# Altium PCB File_Mach_In.PcbDoc
Units mil, origin at the board's own origin, x right, y up, seen from the top; angles counter-clockwise.
Board outline 3895 x 3975 mil, 2 copper layers (Top Layer, Bottom Layer); 38 components, 26 nets, 126 pads, 20 vias.
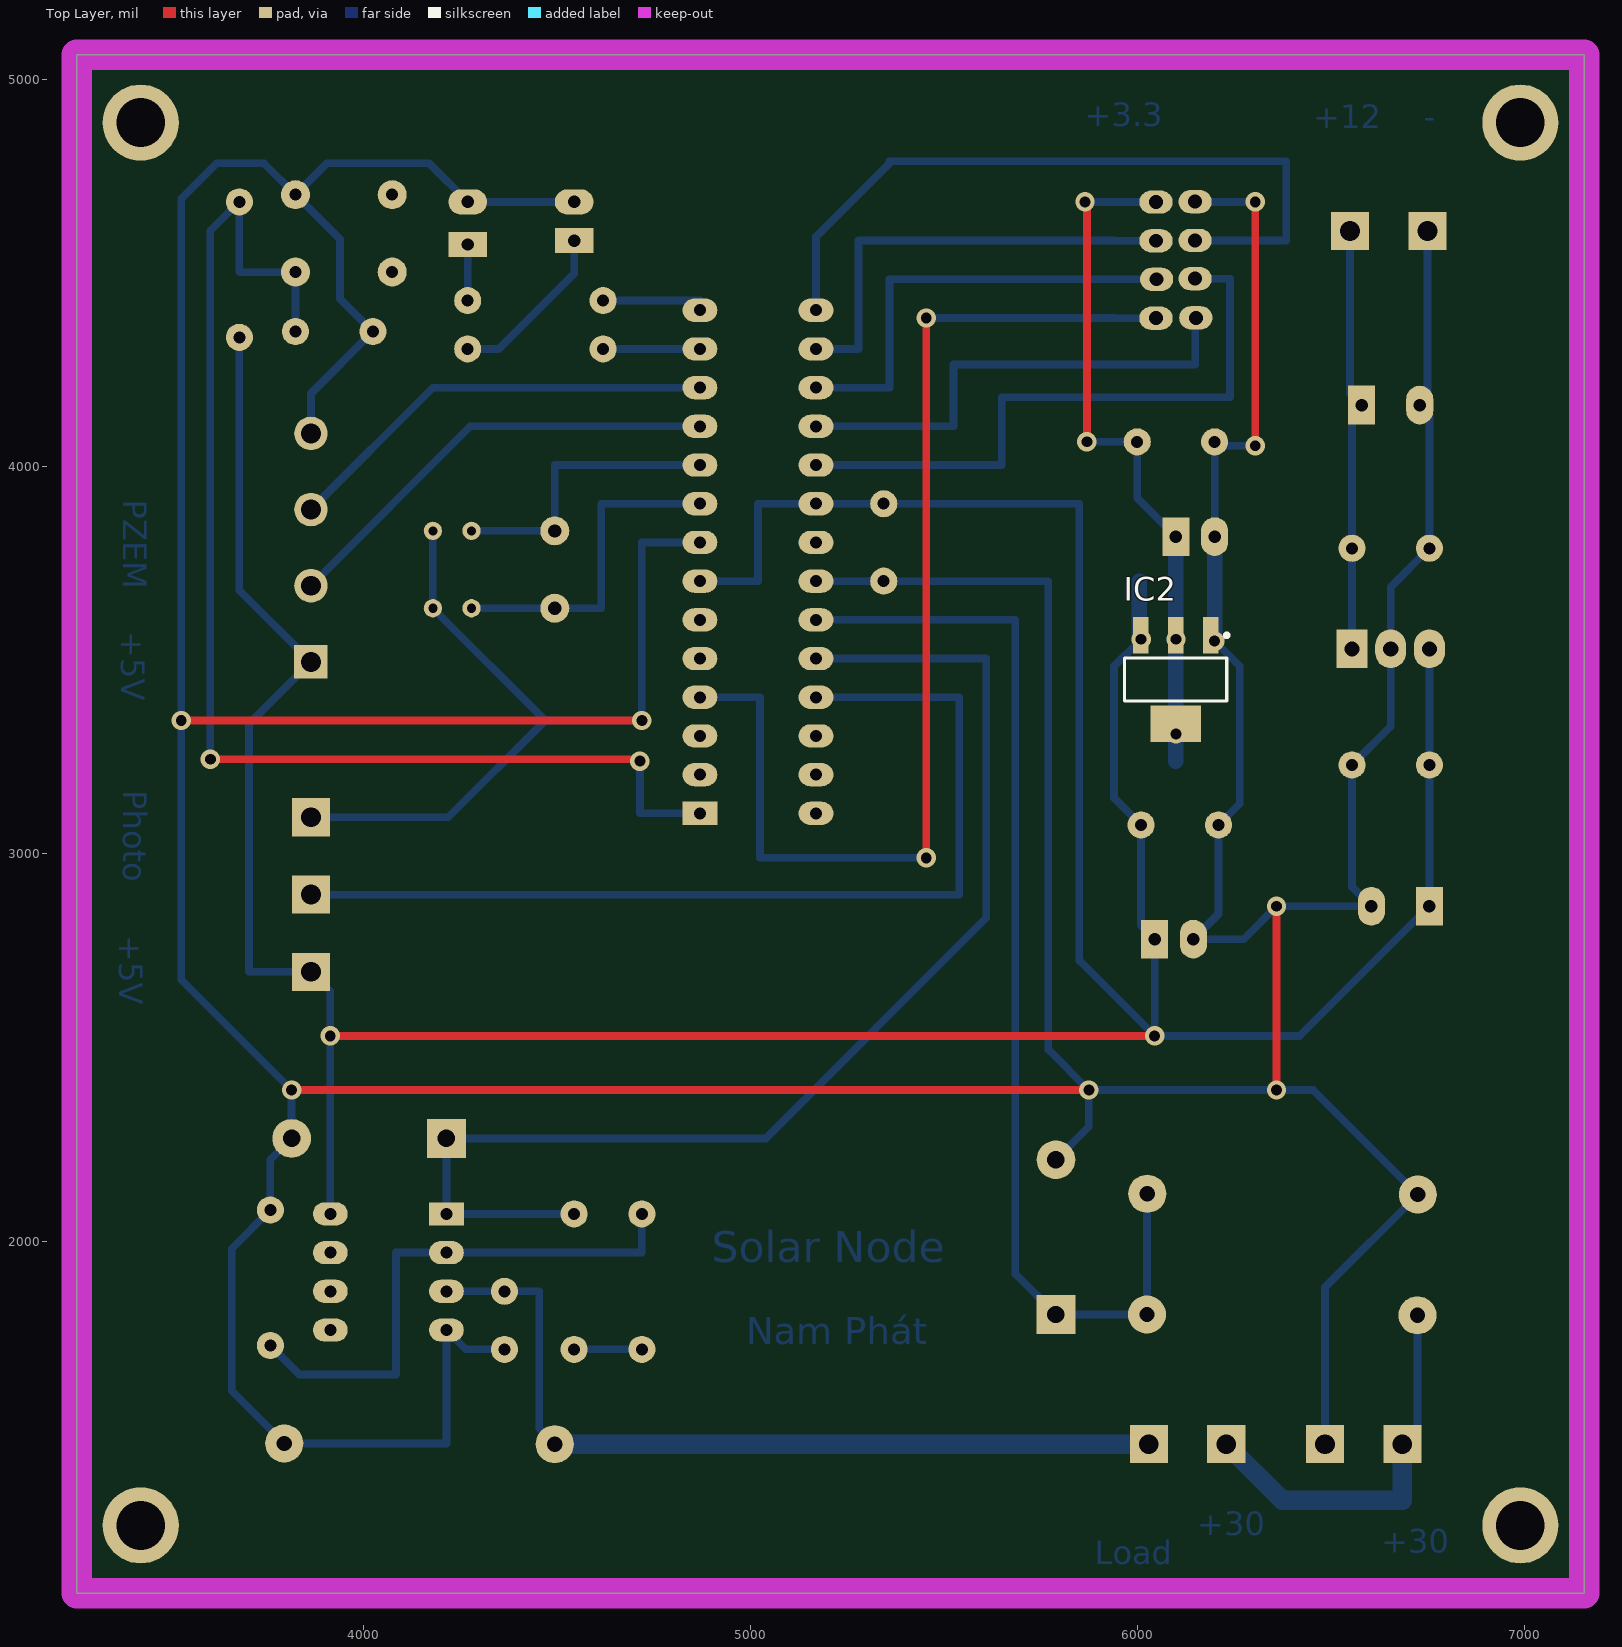
[diagram p0: Top Layer view]
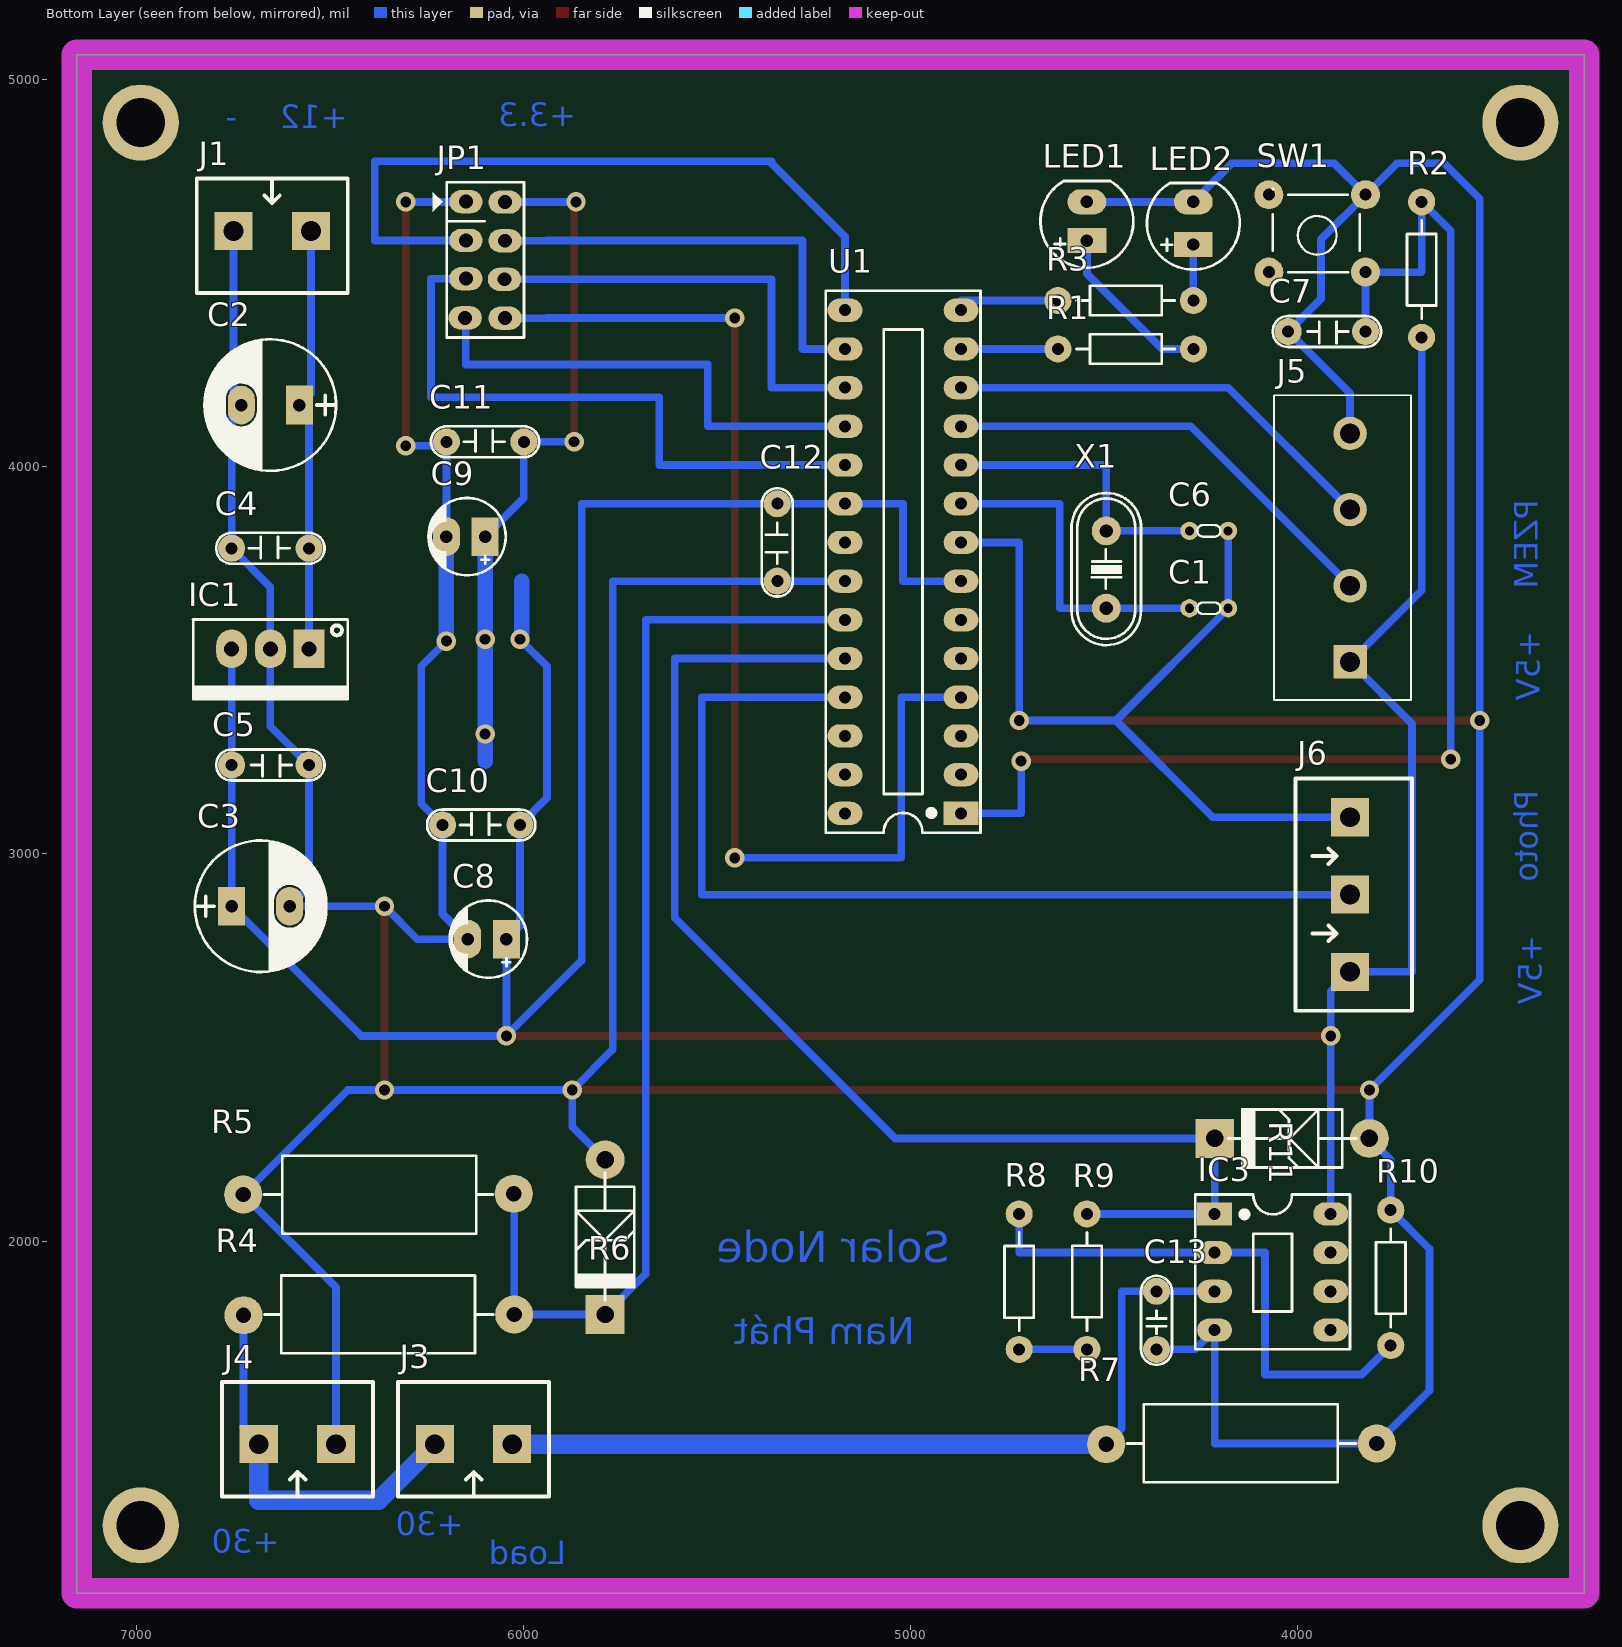
[diagram p1: Bottom Layer view, seen from below]
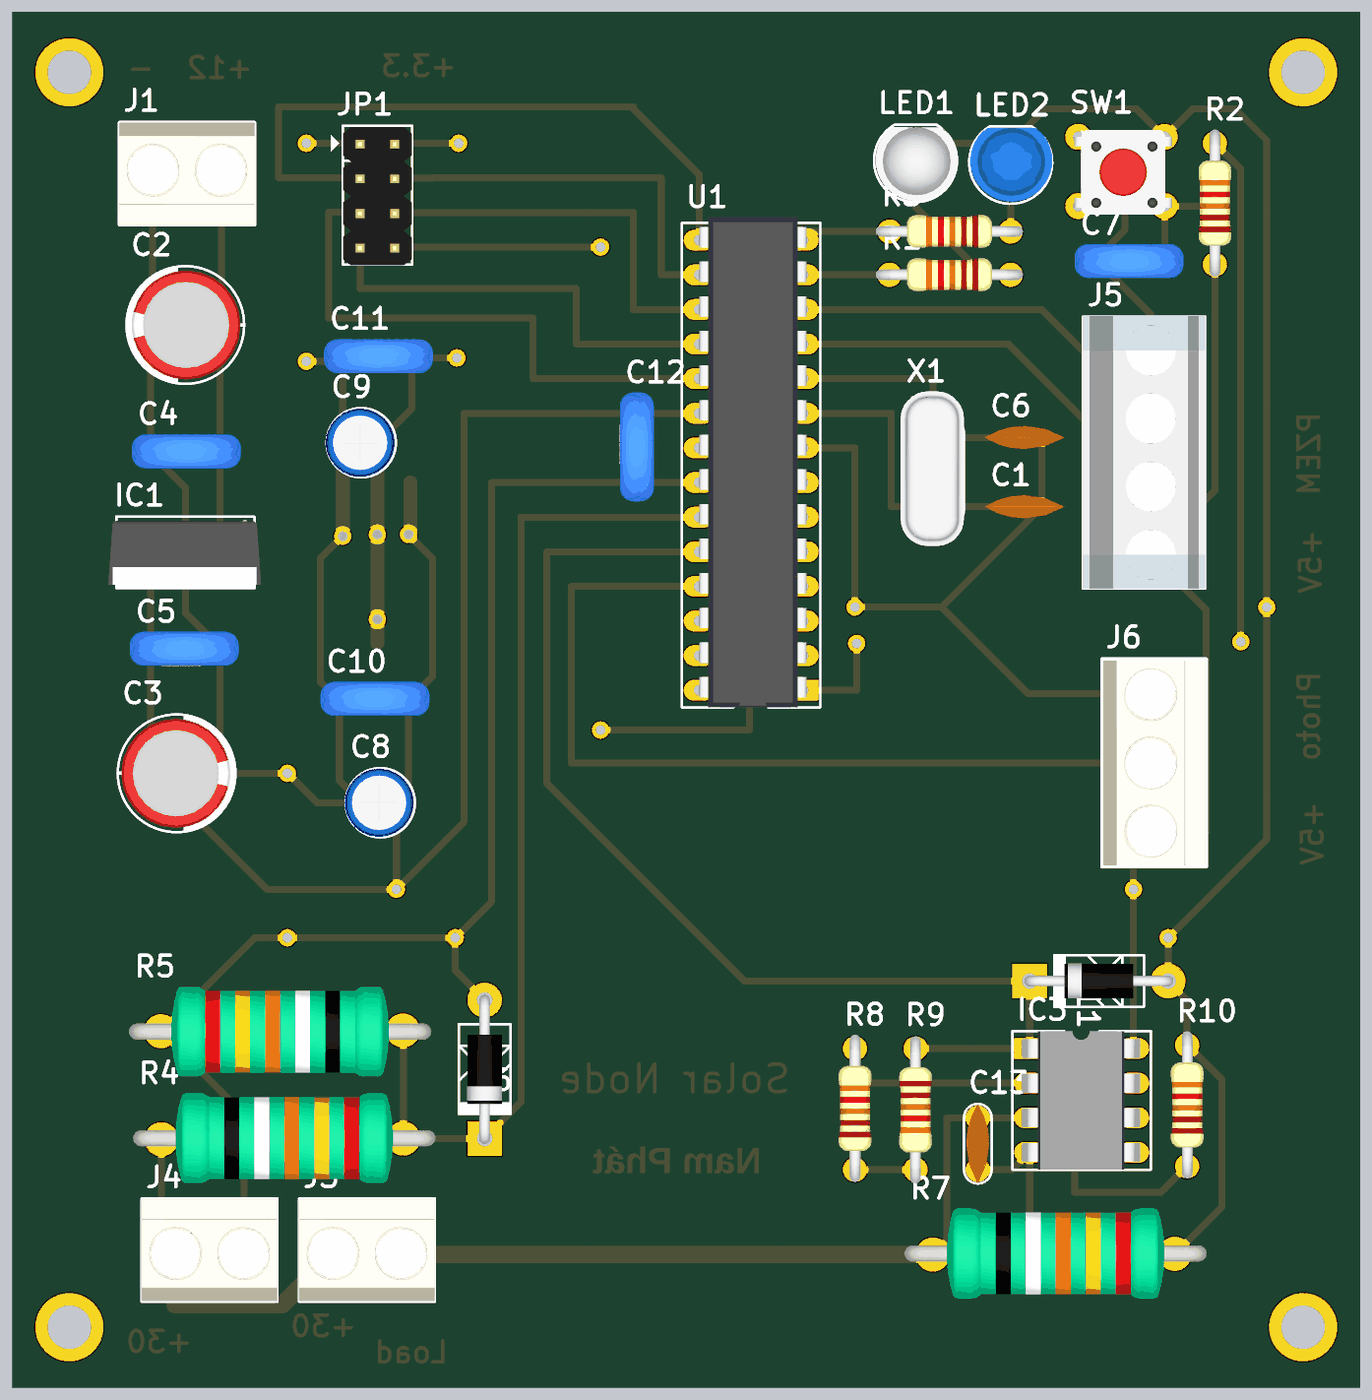
[diagram p2: 3D render of the assembled board from below, using the file's embedded part models]

## Layer stack, top to bottom
Top Solder: solder mask 0.4, Solder Resist, Dk 3.5
Top Layer: signal copper 1.4
Dielectric 1: dielectric 12.6, FR-4, Dk 4.8
Bottom Layer: signal copper 1.4
Bottom Solder: solder mask 0.4, Solder Resist, Dk 3.5

## Board outline
3260,1090 3260,5065 7155,5065 7155,1090

## Design rules (kind name [scope] priority, off if disabled: settings)
Clearance [All] p1: gap=20 ignorepadtopadclearanceinfootprint=FALSE
PolygonConnect [All] p1: connectstyle=Relief reliefconductorwidth=10 reliefentries=4 polygonreliefangle="90 Angle" airgapwidth=10
RoutingVias [All] p1: holewidth=28 width=70 viastyle="Through Hole" minholewidth=28 minwidth=70 maxholewidth=28 maxwidth=70
SolderMaskExpansion [All] p1: expansion=4
Width [All] p1: maxlimit=20 minlimit=20 preferedwidth=20
30 further rules are at their usual default settings.

## Components (designator, comment, footprint, x,y, rotation, side; value= is the part's Value field where it differs from the comment)
C1 "Capacitor Ceramic" Tu-pico 4180,3635 r0 bottom value=22p
C2 "220uF/16V" CP1.5/3.4 6580,4160 r0 bottom value=100uF/35V/50V
C3 "220uF/16V" CP1.5/3.4 6755,2865 r180 bottom value=100uF/35V/50V
C4 "104" CN2 6755,3790 r180 bottom value=0.1uF
C5 "104" CN2 6555,3230 r0 bottom value=0.1uF
C6 "Capacitor Ceramic" Tu-pico 4180,3835 r0 bottom value=22p
C7 "104" CN2 3825,4350 r0 bottom value=0.1uF
C8 "10uF" CP1/2 6045,2780 r0 bottom value=10uF/50V
C9 "10uF" CP1/2 6100,3820 r0 bottom value=10uF/50V
C10 "104" CN2 6210,3075 r180 bottom value=0.1uF
C11 "104" CN2 6200,4065 r180 bottom value=0.1uF
C12 "104" CN2 5345,3705 r90 bottom value=0.1uF
C13 "103" CN1.5 4365,1720 r90 bottom value=0.01uF
IC1 "LM7805" QTO-220 6555,3530 r0 bottom
IC2 "LM1117" SOT223-4N 6099.45,3450.83 r270 top value=LM317
IC3 "LM358" DIP8/W0.3 4215,2070 r270 bottom
J1 "KF2" KF2-5.08 6650,4610 r180 bottom
J3 "KF2" KF2-5.08 6130,1475 r0 bottom
J4 "KF2" KF2-5.08 6585,1475 r0 bottom
J5 "KF4" KF4-5 3865,3791.57 r90 bottom
J6 "KF3" KF3-5.08 3865,3095 r270 bottom
JP1 "Connector 4x2" JP4x2 6100,4535 r270 bottom
LED1 "LED" LED-5-Yellow 4545,4585 r90 bottom value="LED 3 ly Single Colour"
LED2 "LED" LED-5-BLUE 4270,4630 r90 bottom value="LED 3 ly Single Colour"
R1 "330" R1/4W 4620,4305 r180 bottom value="R1/4W - 1K"
R2 "10k" R1/4W 3680,4685 r270 bottom value="R1/4W - 1K"
R3 "330" R1/4W 4620,4430 r180 bottom value="R1/4W - 1K"
R4 "10K/2W" R2W 6025,1810 r0 bottom value="R2W - 47"
R5 "2K/2W" R2W 6725,2120 r180 bottom value="R2W - 47"
R6 "DIODE Zener" DIO-2A-ZEN 5790,1785 r90 bottom
R7 "0.1/2W" R2W 3796,1477 r0 bottom value="R2W - 47"
R8 "47k" R1/4W 4720,2070 r270 bottom value="R1/4W - 1K"
R9 "2k" R1/4W 4545,1720 r90 bottom value="R1/4W - 1K"
R10 "1k" R1/4W 3760,2080 r270 bottom value="R1/4W - 1K"
R11 "DIODE Zener" DIO-2A-ZEN 4240,2265 r180 bottom
SW1 "SW" SW4 3825,4503.5 r0 bottom value="Button chip 4 pin"
U1 "ATmega328-PU" DIP28 4870,3105 r90 bottom
X1 "16Mhz" XT2 4495,3735 r270 bottom value=4Mhz

## Footprints (in the part's own frame and the unit in brackets; to place one, negate y for a bottom-side part, rotate by r counter-clockwise, add the part's x,y. Pads: shape width x height; smd on the part's side, far side on the other; paste and mask are expansions set on the pad)
CN1.5 [mil]
  round 70 hole 31: 1(0,0) 2(150,0)
  silkscreen extent -40,-40 190,40, body extent -40,-33 190,33, height 235
CN2 [mil]
  round 70 hole 31: 1(0,0) 2(200,0)
  silkscreen extent -40,-40 240,40, body extent -54,-44 260,55, height 407
CP1.5/3.4 [mil] "Tu hoa 220->470uF,16V, 470uF/16V,25V"
  rect 70x100 hole 32: 1(0,0)
  oval 70x100 hole 32: 2(150,0)
  silkscreen extent -95,-170 245,170, body extent -85,-157 230,157, height 446
CP1/2 [mil] "Tu hoa < 22uF/16>50V"
  rect 70x100 hole 32: 1(0,0)
  oval 70x100 hole 32: 2(100,0)
  silkscreen extent -53,-100 147,100, body extent -49,-99 149,99, height 287
DIO-2A-ZEN [mil]
  round 100 hole 45: 1(425,0)
  rect 100x100 hole 45: 2(25,0)
  silkscreen extent 61,-75 391,75, body extent 10,-51 440,50, height 100
DIP8/W0.3 [mil] "8 PIN, W 300mil, Pin to pin 100mil"
  rect 60x90 hole 31: 1(0,0)
  oval 60x90 hole 31: 2(100,0) 3(200,0) 4(300,0) 5(300,300) 6(200,300) 7(100,300) 8(0,300)
  silkscreen extent -50,-50 350,350, body extent -50,-40 350,336, height 201
DIP28 [mil] "DIP, 18-Leads, Row Spacing 7.62mm, Pitch 2.54mm, Body 22.8x7.3mm, Window"
  rect 60x90 hole 31: 1(0,0)
  oval 60x90 hole 31: 2(100,0) 3(200,0) 4(300,0) 5(400,0) 6(500,0) 7(600,0) 8(700,0) 9(800,0) 10(900,0) 11(1000,0) 12(1100,0) 13(1200,0) 14(1300,0) 15(1300,300) 16(1200,300) 17(1100,300) 18(1000,300) 19(900,300) 20(800,300) 21(700,300) 22(600,300) 23(500,300) 24(400,300) 25(300,300) 26(200,300) 27(100,300) 28(0,300)
  silkscreen extent -50,-50 1350,350, body extent -50,-10 1367,300, height 200
JP4x2 [mil] "Connector 4x2"
  oval 60x86 hole 36: 1(-150.5,-49.5) 2(-50.5,-49.5) 3(48.5,-49.5) 4(149.5,-51.5) 5(-149.5,51.5) 6(-49.5,51.5) 7(50,50) 8(150.5,51.5)
  silkscreen extent -201,-135 201,101, body extent -197,-100 203,100, height 335
KF2-5.08 [mm]
  rect 2.5x2.5 hole 1.3: 1(-2.54,0) 2(2.54,0)
  silkscreen extent -4.95,-4.08 4.95,3.43, body extent -5,-4.07 5,3.43, height 10
KF3-5.08 [mm]
  rect 2.5x2.5 hole 1.3: 1(0,0) 2(5.08,0) 3(10.147,0)
  silkscreen extent -2.54,-3.58 12.7,4.06, body extent -2.42,-3.51 12.58,3.99, height 10
KF4-5 [mm] "Serie 1337 - 5.00 mm_4 pins"
  rect 2.2x2.2 hole 1.3: 1(-7.5,0)
  round 2.2 hole 1.3: 2(-2.5,0) 3(2.5,0) 4(7.5,0)
  silkscreen extent -10,-4 10,5, body extent -10,-4 10,5, height 13
LED-5-BLUE [mil] "LED 2 PIN, 5 ly , Only colour, pin to pin 110mil"
  rect 65x100 hole 32: 1(-55,0)
  oval 65x100 hole 32: 2(55,0)
  silkscreen extent -120,-120 104,120, body extent -113,-120 100,116, height 339
LED-5-Yellow [mil] "LED 2 PIN, 5 ly , Only colour,pin to pin 100mil"
  rect 65x100 hole 32: 1(0,0)
  oval 65x100 hole 32: 2(100,0)
  silkscreen extent -70,-120 154,120, body extent -67,-122 147,115, height 339
QTO-220 [mil] "TO-220 - 1-2-3"
  rect 80x100 hole 39: 1(0,0)
  oval 80x100 hole 39: 2(100,0) 3(200,0)
  silkscreen extent -100,-76 300,130, body extent -119,-64 322,121, height 755
R1/4W [mil] "R 1/4W, 2 Pin, 350mil"
  round 70 hole 31: 1(0,0) 2(350,0)
  silkscreen extent 48,-38 302,38, body extent -40,-47 386,47, height 111
R2W [mm] "R2W, 2 pin, 700mil"
  round 2.5 hole 1: 1(0,0) 2(17.755,0.051)
  silkscreen extent 1.37,-2.57 16.38,2.54, body extent -2.36,-3.33 19.84,3.27, height 8.3
SOT223-4N [mm] "SOT223, 4-Leads, Body 6.5x3.5mm, Pitch 2.3mm, Lead Span 7mm, IPC Medium Density"
  rect 2.4x1 smd: 1(-2.9,2.3) 2(-2.9,0) 3(-2.9,-2.3)
  rect 2.4x3.3 smd: 4(2.9,0)
  silkscreen extent -3.02,-3.35 1.4,3.48, body extent -3.39,-3.27 3.5,3.23, height 1.72
SW4 [mil] "SW button 4pin, 250 x250 mil"
  round 75 hole 31: 1(0,0) 2(250,-200) 3(250,0) 4(0,-200)
  silkscreen extent 15,-215 240,0, body extent -36,-220 276,24, height 276
Tu-pico [mm] "Tu gom mini"
  round 1.2 hole 0.6: 1(0,0) 2(2.54,0)
  silkscreen extent 0.51,-0.38 2.03,0.38, body extent -1.65,-0.85 4.19,0.85, height 6.12
XT2 [mil] "Footpin for Crystal 2 pin"
  round 75 hole 34: 1(-100,0) 2(100,0)
  silkscreen extent -198,-90 195,90, body extent -233,-93 213,90, height 138

## Part data
C1 C6: library part CapCeramic, "Capacitor", LatestRevisionDate=17-Jul-2002, LatestRevisionNote="Re-released for DXP Platform.", PackageReference=RAD-0.3, Published=8-Jun-2000, Publisher="Altium Limited"
C2 C3: library part CP3, "Cap 100uF/35V - 470uF/16V", Description 1="1000uF/6,3V - 470uF/16V - 330uF - 25V", Description 2="220uF/35V - 100uF/50V - 63V - 4,7uF/200V", Description 3="22uF => 33uF100V - 3,3uF => 4,7uF/250V", Description 4="2,2uF =>3,3uF/350 - 2,2uF/400V - 1uF/450V"
C4 C5 C7 C10 C11 C12: library part CN2, "Cap np 104 => 105pF"
C8 C9: library part CP1, "Cap P  0,1uF < 22uF , 16 - 50V", Description 1="10 => 220uF/6,3V/10V - 10uF => 100uF/16V", Description 2="0,1uF => 33uF/50V - 10uF => 22uF/63V", Description 3="0,47uF => 10uF/100V"
C13: library part CN1.5, "Cap np 682pF => 104pF"
IC1: library part LM78xx, "On ap +, from + 5 to + 24VDC", =LM7808
IC2: "Available in 1.8V, 2.5V, 2.85V, 3.3V, 5V, and  Adjustable Versions"
IC3: "Low-Power Dual Operational Amplifier"
J1 J3 J4: Manufacturer="Würth Elektronik eiSos GmbH", partNo=691103110002, ComponentLink1 Description=Manufacturer, ComponentLink1URL=http://www.we-online.com, ComponentLink2 Description=Datasheet, ComponentLink2URL=http://katalog.we-online.de/em/datasheet/6911031100xx.pdf, Created by="Karrer Zheng", Created Date="29 October 2013", NoPins=2
J5: Manufacturer="W¨¹rth Elektronik eiSos GmbH", partNo=691133710004, ComponentLink1 Description=Manufacturer, ComponentLink1 URL=http://www.we-online.com, ComponentLink2 Description=Datasheet, ComponentLink2 URL=http://katalog.we-online.de/em/datasheet/6911337100xx.pdf, Created by="Baojun Chen", Created Date=4-Aug-15, NoPins=4
J6: Manufacturer="Würth Elektronik eiSos GmbH", partNo=691103110003, ComponentLink1 Description=Manufacturer, ComponentLink1URL=http://www.we-online.com, ComponentLink2 Description=Datasheet, ComponentLink2URL=http://katalog.we-online.de/em/datasheet/6911031100xx.pdf, Created by="Karrer Zheng", Created Date="29 October 2013", NoPins=3
JP1: library part JP4x2
LED1 LED2: "LED Single colour Green and Red"
R1 R2 R3 R8 R9 R10: library part R1/4W, "Resistor 1/4W"
R4 R5 R7: library part R2W, "Resistor 2W"
R6 R11: "Zenner"
SW1: library part SW4, "Switch button 4 pin"
U1: "8-bit AVR Microcontroller, 32KB Flash, 1KB EEPROM, 2KB SRAM, 28-pin PDIP, Industrial Grade (-40°C to 85°C)", Supplier Part Number 1=ATMEGA328-PU-ND, ComponentLink1Description="Manufacturer Link", ComponentLink1URL=http://www.atmel.com/products/avr/default.asp?, ComponentLink2Description="ATmega48A/48PA/88A/88PA/168A/168PA/328/328P Datasheet", ComponentLink2URL=http://www.atmel.com/dyn/resources/prod_documents/8271.pdf, ComponentLink3Description="ATmega48A/48PA/88A/88PA/168A/168PA/328/328P Summary", ComponentLink3URL=http://www.atmel.com/dyn/resources/prod_documents/8271S.pdf, ComponentLink4Description="Atmel.com Home", ComponentLink4URL=http://www.atmel.com, DatasheetVersion="revA, Jan-2010", PackageDescription="28-lead (0.300\"/7.62mm Wide) Plastic Dual Inline Package (PDIP)", PackageReference=28P3, PackageVersion="revB, Sep-2001", Published=1-Apr-2010, Publisher="Altium Limited", Supplier 1=Digi-Key, Supplier 2=Mouser, Supplier Part Number 2=556-ATMEGA328-PU
X1: library part XT2, "Crystal For all Crystal 2pin."

## Free pads (board coordinates)
  round 196.85 hole 125.98: 2(3425,1265) 2(3425,4890) 2(6990,1265) 2(6990,4890)

## Via types
v1: diameter 50, hole 28, Top Layer to Bottom Layer, 20 vias

## Nets (pads, with @x,y where several pads share a name; then routed paths per layer and width w, separated by ;. In a path a pad name is that pad's centre, name@x,y a point inside that pad or via, vN(x,y) a via of type N, cw(c..) or ccw(c..) an arc to the next point about the centre after c; other vN are vias at no path point)
+5: C3.1 C5.2 C8.1 C10.2 C12.2 IC1.3 IC2.3 IC3.8 J5.1 J6.3 R2.2 U1.7 U1.20 | length 10137.7
  Top Layer w20: v1(3915,2530) v1(6045,2530)
  Bottom Layer w20: R2.2 3680,3681.3 J5.1 3705,3336.3 3705,2695.5 J6.3 3915,2645.5 v1(3915,2530) IC3.8 3925,2070 IC3.8@3935,2080 ; U1.7 5020,3705 5020,3905 U1.20 C12.2 5850,3905 5850,2725 v1(6045,2530) ; v1@6005,3550 5940,3485 5940,3145 C10.2 6010,2815 C8.1 v1(6045,2530) ; IC1.3 C5.2 C3.1 6420,2530 v1(6045,2530)
  Bottom Layer w40: v1@6005,3550 6005,3705
  other v1: 6010,3555
+12: C2.1 C4.2 IC1.1 J1.2 | length 1102.8
  Bottom Layer w20: J1.2 6550,4190 C2.1 6555,4135 C4.2 IC1.1
DC_Cur: IC3.1 R9.2 R11.2 U1.24 | length 3266.1
  Bottom Layer w20: R9.2 IC3.1 R11.2 5040,2265 5610,2835 5610,3505 U1.24
DC_Vol: R4.1 R5.2 R6.2 U1.23 | length 2899.5
  Bottom Layer w20: U1.23 5685,3605 5685,1915 R6.2 R4.1 R5.2@6025,2121
GND: C1.1 C2.2 C3.2 C4.1 C5.1 C6.1 C7.2 C8.2 C9.2 C10.1 C11.1 C12.1 C13.1 IC1.2 IC2.1 IC3.4 J1.1 J4.1 J5.4 J6.1 JP1.1 LED1.2 LED2.2 R5.1 R6.1 R7.1 R10.1 R11.1 SW1.4 U1.8 U1.22 | length 20670.7
  Top Layer w20: v1(3530,3345) v1(4720,3345) ; v1@3835,2390 v1(5875,2390) ; v1(6305,4055) v1(6305,4685) ; v1(6360,2390) v1(6360,2865)
  Bottom Layer w20: J6.1 4220,3095 4470,3345 ; J5.4 3865,4190 C7.2 3940,4435 3940,4588.5 SW1.4 ; C6.1 C1.1 4470,3345 ; C13.1 4265,1720 IC3.4 4215,1477 R7.1 3660,1613 3660,1980 R10.1 3760,2210 R11.1 3810,2265 3795,2280 3815,2300 v1(3815,2390) 3530,2675 v1(3530,3345) 3530,4693.25 3621.75,4785 3743.5,4785 SW1.4 ; LED1.2 LED2.2 4170,4785 3906.5,4785 SW1.4 ; U1.8 4720,3805 v1(4720,3345) 4470,3345 ; U1.22 C12.1 5770,3705 5770,2495 v1(5875,2390) ; R6.1 5875,2295 v1(5875,2390) ; JP1.1@6150,4685 v1(6305,4685) ; v1(6200,3550) 6265,3485 6265,3130 C10.1 6210,2845 C8.2 6275,2780 v1(6360,2865) C3.2 6555,2915 C5.1 6655,3330 IC1.2 6655,3690 C4.1 6755,4135 C2.2 6750,4180 J1.1 ; C9.2 C11.1@6200,4055 ; C11.1 C11.1@6200,4055 ; v1(6305,4055) C11.1@6200,4055 ; J4.1 6485,1880 R5.1 6455,2390 v1(6360,2390) 6350,2400 6340,2390 v1(5875,2390)
  Bottom Layer w40: v1(6200,3550) C9.2
LED0: R1.1 U1.13 | length 250
  Bottom Layer w20: R1.1 U1.13
LED1: R3.1 U1.14 | length 275
  Bottom Layer w20: R3.1 4870,4430 U1.14
NetC13_2: C13.2 IC3.3 J3.1 R7.2 | length 2191.6
  Bottom Layer w20: IC3.3 C13.2 4455,1870 4455,1515 R7.2
  Bottom Layer w50: R7.2 J3.1 J3.1@6035,1475
NetIC3_2: IC3.2 R8.1 R10.2 | length 1406.1
  Bottom Layer w20: R10.2 3835,1655 4085,1655 4085,1970 IC3.2 4720,1970 R8.1
NetLED1_1: LED1.1 R1.2 | length 440.8
  Bottom Layer w20: R1.2 4350,4305 4545,4500 LED1.1
NetLED2_1: LED2.1 R3.2 | length 145
  Bottom Layer w20: R3.2 LED2.1
NetR8_2: R8.2 R9.1 | length 175
  Bottom Layer w20: R9.1 R8.2
OSC1: C1.2 U1.9 X1.2 | length 860
  Bottom Layer w20: C1.2 X1.2 4615,3635 4615,3905 U1.9
OSC2: C6.2 U1.10 X1.1 | length 760
  Bottom Layer w20: C6.2 X1.1 4495,4005 U1.10
PB1: JP1.2 U1.15 | length 1929.7
  Bottom Layer w20: U1.15 5170,4595 5360,4785 5360,4790 6385,4790 6385,4585 6149.5,4585 JP1.2
PB2: JP1.6 U1.16 | length 1159
  Bottom Layer w20: U1.16 5280,4305 5280,4585 5940,4585 5940,4584.5 JP1.6
PB3: JP1.7 U1.17 | length 1160
  Bottom Layer w20: U1.17 5360,4205 5360,4485 JP1.7
PB4: JP1.4 U1.18 | length 1270
  Bottom Layer w20: U1.18 5525,4105 5525,4265 6150,4265 JP1.4@6150,4395
PB5: JP1.3 U1.19 | length 1642
  Bottom Layer w20: U1.19 5650,4005 5650,4180 6240,4180 6240,4486.5 JP1.3
PC2: J6.2 U1.25 | length 2555
  Bottom Layer w20: J6.2 5540,2895 5540,3405 U1.25
PD2: JP1.8 U1.4 | length 3003.1
  Top Layer w20: v1(5455,2990) v1(5455,4385)
  Bottom Layer w20: U1.4 5025,3405 5025,2990 v1(5455,2990) v1@5445,3000 ; v1(5455,4385) 5940,4385 5940,4384.5 JP1.8
PD5: J5.2 U1.11 | length 1175.6
  Bottom Layer w20: J5.2 4276.85,4105 U1.11
PD6: J5.3 U1.12 | length 1135.5
  Bottom Layer w20: J5.3 4180,4205 U1.12
RESET: C7.1 R2.1 SW1.1 U1.1 | length 3360.7
  Top Layer w20: v1(3605,3245) 4710,3245 v1(4715,3240)
  Bottom Layer w20: v1(3605,3245) 3605,4610 R2.1 3680,4505 3681.5,4503.5 SW1.1 C7.1 C7.1@3819,4356 ; v1(4715,3240) 4715,3105 U1.1
VCC3.3: C9.1 C11.2 IC2.2 JP1.5 | length 1807.6
  Top Layer w20: v1(5865,4685) 5870,4680 v1(5870,4065)
  Bottom Layer w20: v1(5865,4685) 6040,4685 JP1.5@6050,4695 ; v1(5870,4065) C11.2 6000,3920 C9.1
  Bottom Layer w40: 6100,3240 v1(6100,3310) v1(6100,3555) C9.1
VCC30V: J3.2 J4.2 R4.2 | length 1009.2
  Bottom Layer w20: J4.2 6724,1514 R4.2
  Bottom Layer w50: J3.2 6375,1330 6685,1330 J4.2
pads on no net: IC2.4 IC3.5 IC3.6 IC3.7 SW1.2 SW1.3 U1.2 U1.3 U1.5 U1.6 U1.21 U1.26 U1.27 U1.28

## Keep-outs
Keep-Out Layer:
  the board outline again, w78.74

## Other copper
Bottom Layer:
  text "+3.3" at 5865,4880 h60
  text "+12" at 6455,4875 h60
  text "-" at 6740,4875 h60
  text "PZEM" at 3380,3915 h60 r270
  text "+5V" at 3375,3575 h60 r270
  text "Photo" at 3380,3165 h60 r270
  text "+5V" at 3370,2790 h60 r270
  text "Solar Node" at 4900,1945 h80
  text "Nam Phát" at 4990,1710 h120
  text "+30" at 6155,1240 h60
  text "+30" at 6630,1195 h60
  text "Load" at 5890,1165 h60

## Dimensions
7660,5100 to 7670,1050 on Multi-Layer
3225,5410 to 7195,5480 on Multi-Layer